# Altium PCB PCB_final.PcbDoc
Units mm, origin at the board's own origin, x right, y up, seen from the top; angles counter-clockwise.
Board outline 152.4 x 101.6 mm, 2 copper layers (Top Layer, Bottom Layer); 36 components, 46 nets, 154 pads, 7 vias.
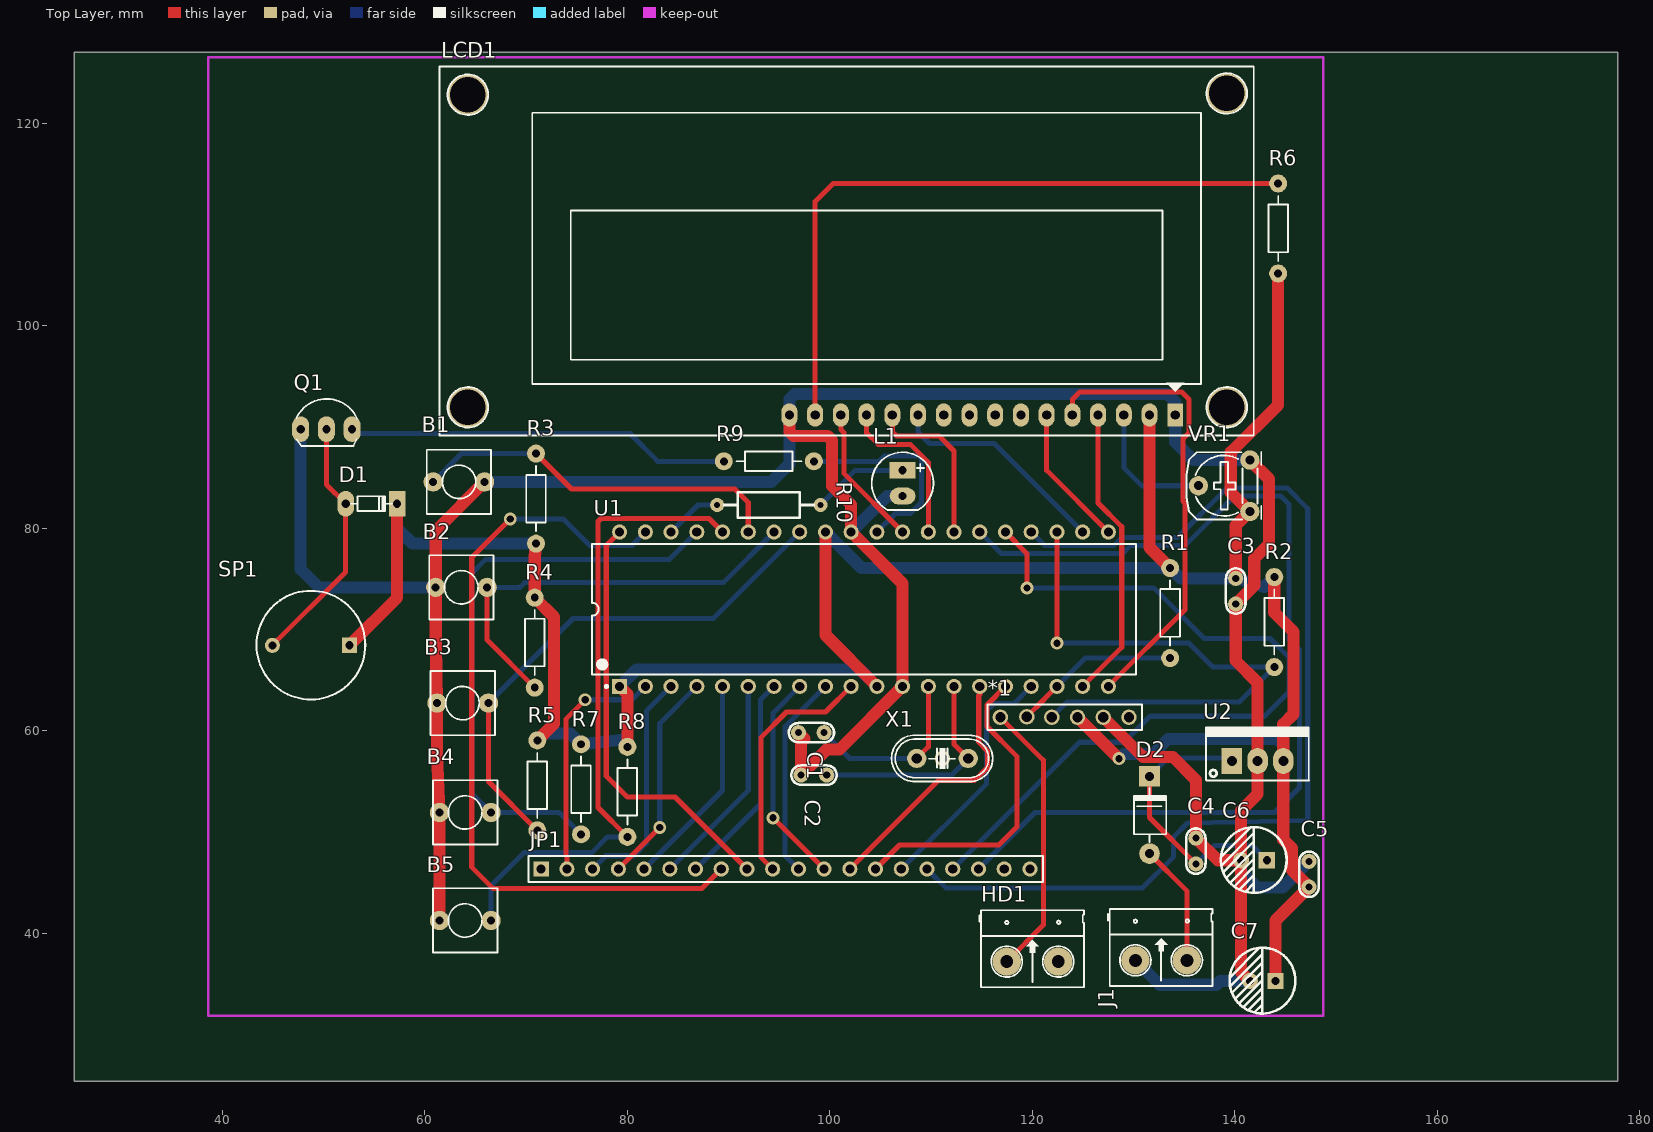
[diagram p0: Top Layer view]
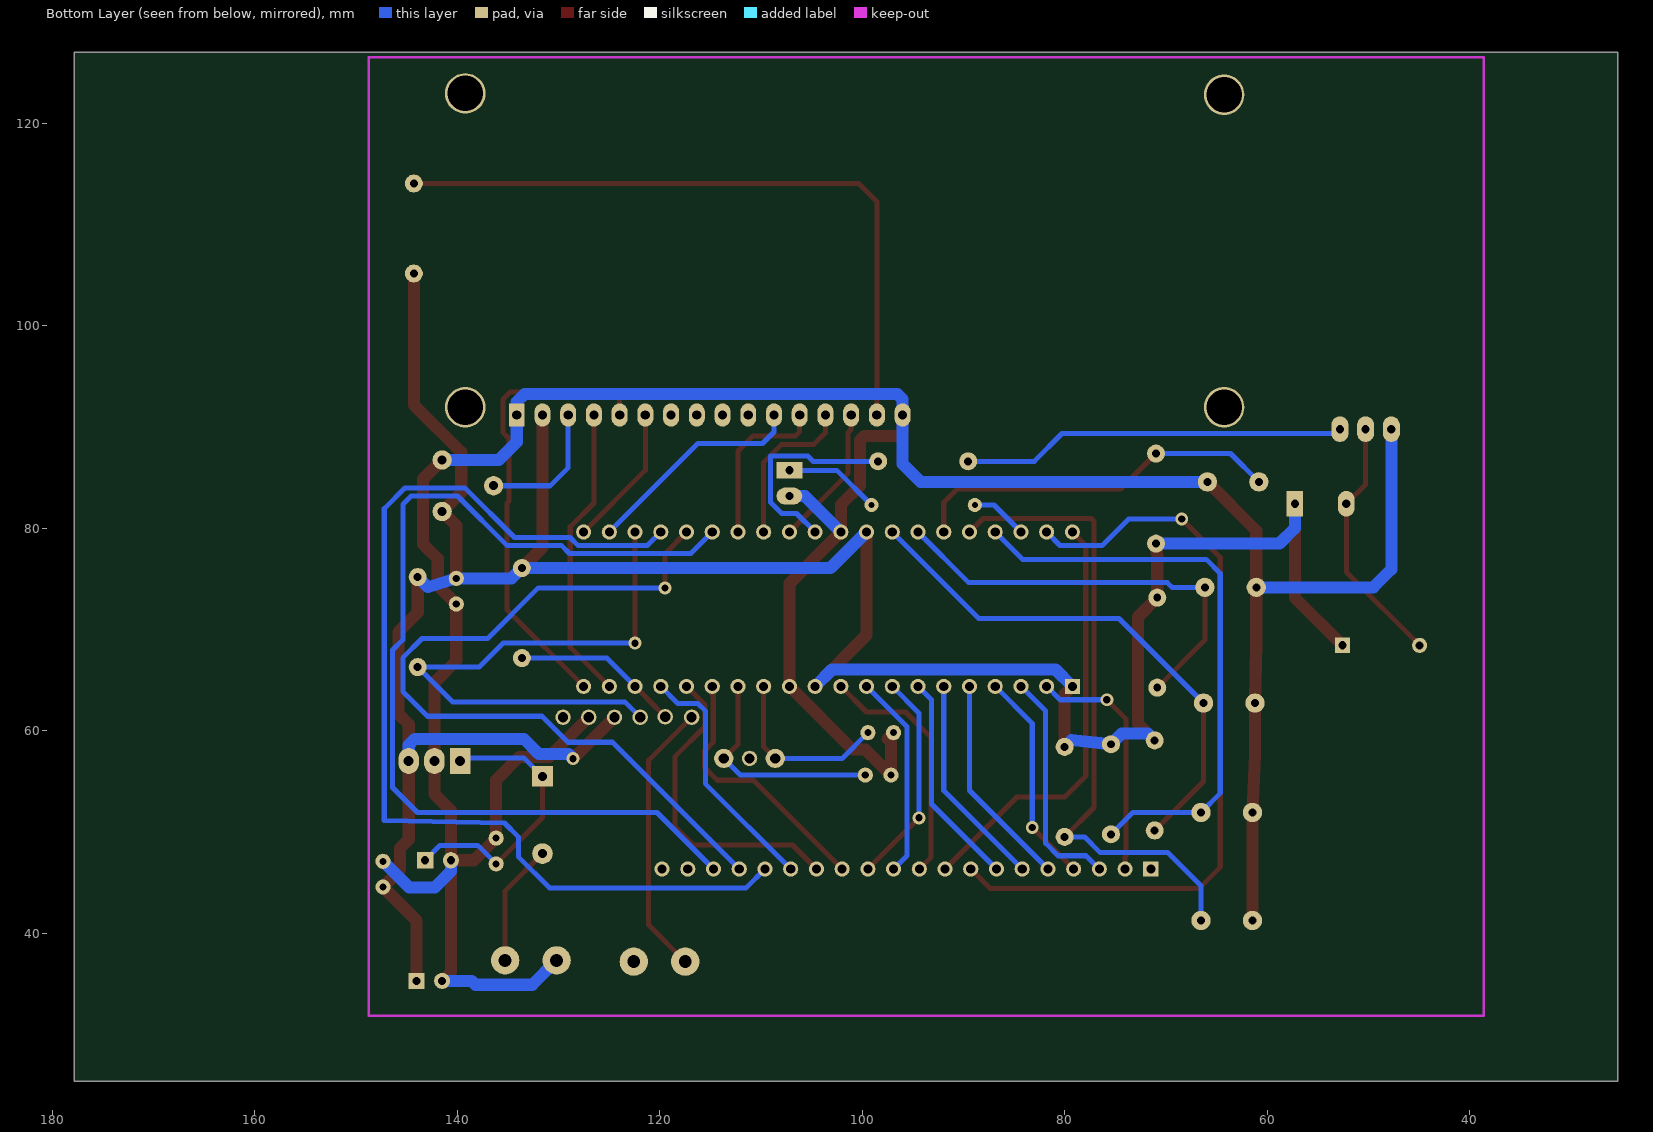
[diagram p1: Bottom Layer view, seen from below]
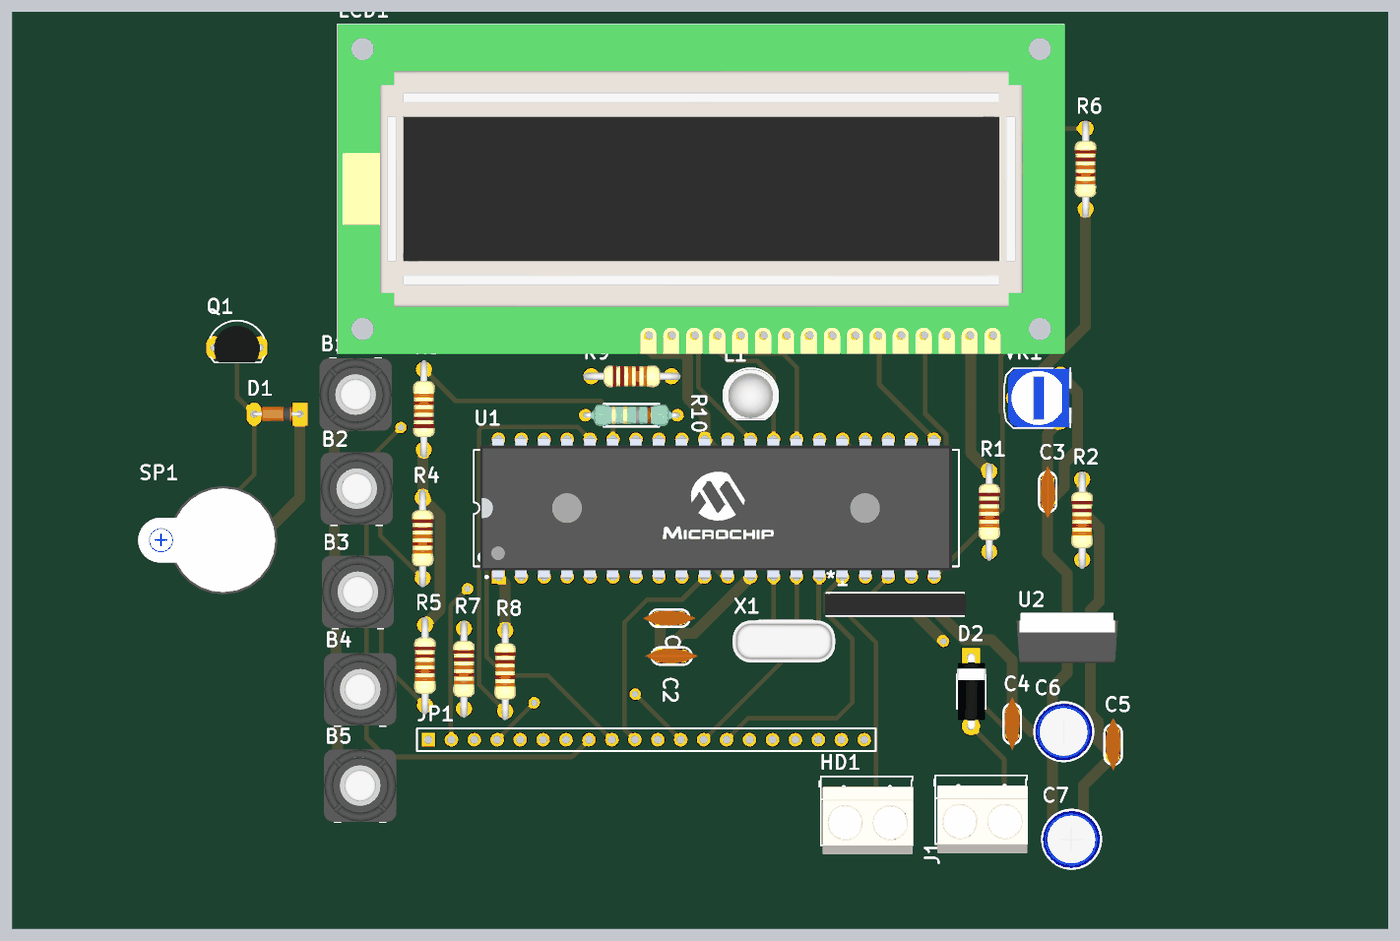
[diagram p2: 3D render of the assembled board from above, using the file's embedded part models]

## Layer stack, top to bottom
Top Solder: solder mask 0.0102, Solder Resist, Dk 3.5
Top Layer: signal copper 0.0356
Dielectric 1: dielectric 0.32, FR-4, Dk 4.8
Bottom Layer: signal copper 0.0356
Bottom Solder: solder mask 0.0102, Solder Resist, Dk 3.5

## Board outline
25.4,25.4 177.8,25.4 177.8,127 25.4,127

## Design rules (kind name [scope] priority, off if disabled: settings)
Clearance [All] p1: gap=0.31 ignorepadtopadclearanceinfootprint=FALSE
PolygonConnect [All] p1: connectstyle=Relief reliefconductorwidth=0.254 reliefentries=4 polygonreliefangle="90 Angle" airgapwidth=0.254
RoutingVias [All] p1: holewidth=0.711 width=1.27 viastyle="Through Hole" minholewidth=0.711 minwidth=1.27 maxholewidth=0.711 maxwidth=1.27
SolderMaskExpansion [All] p1: expansion=0.102 istentingtop=FALSE
SupplyNets "Schematic Supply Nets_1" [InNet('GND')] p1: voltage=0.000
SupplyNets "Schematic Supply Nets" [InNet('+5')] p2: voltage=0.000
Width 5v [InNet('+5')] p1: maxlimit=1.6 minlimit=0.5 preferedwidth=1.2
Width gnd [InNet('GND')] p2: maxlimit=1.6 minlimit=0.5 preferedwidth=1.2
Width [All] p3: maxlimit=0.8 minlimit=0.3 preferedwidth=0.5
30 further rules are at their usual default settings.

## Classes and differential pairs
component class Power_BZ_LED_HD: C4 C5 C7 D1 D2 HD1 J1 JP1 L1 P1 Q1 R9 R10 SP1 U2
component class MCU: *1 C1 C2 C3 R1 R2 U1 X1
component class LCD_BT: B1 B2 B4 LCD1 R3 R4 R5 R6 R7 R8 VR1

## Components (designator, comment, footprint, x,y, rotation, side; value= is the part's Value field where it differs from the comment)
*1 "DS3231 RTC" 2RTC-DS3231-MODULE 123.19,59.436 r90 top
B1 "" SW2 65.913,84.582 r180 top value="SW chip 2 pin"
B2 "" SW2 61.087,74.168 r0 top value="SW chip 2 pin"
B3 "" SW2 61.214,62.738 r0 top value="SW chip 2 pin"
B4 "" SW2 61.468,51.943 r0 top value="SW chip 2 pin"
B5 "" SW2 61.468,41.275 r0 top value="SW chip 2 pin"
C1 "22pF" "tu gom" 98.171,59.817 r180 top
C2 "22pF" "tu gom" 98.425,55.626 r180 top
C3 "104" "tu gom" 140.081,73.787 r270 top
C4 "100nF" "tu gom" 136.144,48.133 r90 top
C5 "100nF" "tu gom" 147.32,45.847 r90 top
C6 "100uF" "tu hoa 6.5mm" 141.859,47.244 r180 top
C7 "100uF" "tu hoa 6.5mm" 142.723,35.331 r180 top
D1 "1N4148" "DIODE 0.5A" 54.737,82.423 r180 top
D2 "1N4007" "DIODE 1A" 131.572,46.609 r270 top
HD1 "Header 2" HED2 117.475,37.211 r0 top
J1 "TERMINAL2" HED2 130.175,37.338 r0 top
JP1 "" HDR1X20 71.501,46.355 r0 top
L1 "LED RED" LED-5MM-RED 107.188,85.725 r270 top
LCD1 "LCD16x2A" LCD16X2 134.112,91.186 r180 top
Q1 "NPN S8050" QTO-92 50.292,89.789 r0 top value=C1815
R1 "1k" R1/4W 133.604,67.183 r90 top value="R1/4W - 1K"
R2 "1k" R1/4W 143.891,66.294 r90 top value="R1/4W - 1K"
R3 "1k" R1/4W 70.993,87.376 r270 top value="R1/4W - 1K"
R4 "1k" R1/4W 70.866,64.262 r90 top value="R1/4W - 1K"
R5 "1k" R1/4W 71.12,50.165 r90 top value="R1/4W - 1K"
R6 "1k" R1/4W 144.272,105.156 r90 top value="R1/4W - 1K"
R7 "1k" R1/4W 75.438,49.784 r90 top value="R1/4W - 1K"
R8 "1k" R1/4W 80.01,49.53 r90 top value="R1/4W - 1K"
R9 "1K" R1/4W 98.425,86.614 r180 top value="R1/4W - 1K"
R10 "220R" "tro vach 1/4w" 93.98,82.296 r0 top
SP1 "Speaker" SPEAKER 52.578,68.453 r180 top value="Speaker Chip"
U1 "PIC16F877A-E/P_1" PDIP600-P40 103.346,72.009 r0 top
U2 "7805" QTO-220 139.7,57.023 r0 top value=LM7805
VR1 "10K" "Bien Tro Tam Giac Dung" 141.478,81.661 r90 top
X1 "8Mhz" XT2 111.125,57.277 r0 top

## Footprints (in the part's own frame and the unit in brackets; to place one, negate y for a bottom-side part, rotate by r counter-clockwise, add the part's x,y. Pads: shape width x height; smd on the part's side, far side on the other; paste and mask are expansions set on the pad)
2RTC-DS3231-MODULE [mil]
  round 60 hole 39.37: 1(75,250) 2(76.9,147.09) 3(75,50) 4(75,-50) 5(75,-150) 6(75,-250)
  silkscreen extent 25,-300 125,300, body extent 28,-308 122,308, height 335
"Bien Tro Tam Giac Dung" [mil] "RM065"
  round 75 hole 35: 1(0,0) 2(100,200) 3(200,0)
  silkscreen extent -31,-44 231,246, body extent -28,-50 228,228, height 279
"DIODE 0.5A" [mil] "Diode muoi, xung"
  oval 65x100 hole 32: 1(100,0)
  rect 65x100 hole 32: 2(-100,0)
  silkscreen extent -80,-30 80,28, body extent -108,-33 108,32, height 61
"DIODE 1A" [mil] "Diode 1A"
  round 80 hole 35: 1(-50,0)
  rect 80x80 hole 35: 2(-350,0)
  silkscreen extent -305,-61 -95,65, body extent -366,-61 -34,65, height 122
HDR1X20 [mm] "Connector; Header; 20 Position"
  rect 1.5x1.5 hole 0.9: 1(0,0)
  round 1.5 hole 0.9: 2(2.54,0) 3(5.08,0) 4(7.62,0) 5(10.16,0) 6(12.7,0) 7(15.24,0) 8(17.78,0) 9(20.32,0) 10(22.86,0) 11(25.4,0) 12(27.94,0) 13(30.48,0) 14(33.02,0) 15(35.56,0) 16(38.1,0) 17(40.64,0) 18(43.18,0) 19(45.72,0) 20(48.26,0)
  silkscreen extent -1.27,-1.27 49.53,1.27
HED2 [mil] "Header 2, 2 pin, hight 300mil, Pin to Pin 200, Colour Green"
  round 110 hole 50: 1(0,0) 2(200,0)
  silkscreen extent -106,-100 300,200, body extent -92,-140 302,155, height 394
LCD16X2 [mil] "LCD dipslay 16x2, 16 pin"
  rect 62x90 hole 36: 1(0,0)
  oval 62x90 hole 36: 2(100,0) 3(200,0) 4(300,0) 5(400,0) 6(500,0) 7(600,0) 8(700,0) 9(800,0) 10(900,0) 11(1000,0) 12(1100,0) 13(1200,0) 14(1300,0) 15(1400,0) 16(1500,0)
  round 157.48 hole 137.8: "Hole 0"(-200,-30) "Hole 0"(-200,-1250) "Hole 0"(2750,-1245) "Hole 0"(2750,-30)
  silkscreen extent -305,-1355 2860,80, body extent -309,-1355 2860,82, height 414
LED-5MM-RED [mil] "LED 2 PIN, 5 ly , Only colour,pin to pin 100mil"
  rect 65x100 hole 32: 1(0,0)
  oval 65x100 hole 32: 2(100,0)
  silkscreen extent -70,-120 154,120, body extent -65,-119 149,118, height 339
PDIP600-P40 [mm] "DIP, 40-Leads, Row Spacing 15.24mm, Pitch 2.54mm, Body 51.8x13.5mm"
  rect 1.5x1.5 hole 0.9: 1(-24.098,-7.62)
  round 1.5 hole 0.9: 2(-21.558,-7.62) 3(-19.018,-7.62) 4(-16.478,-7.62) 5(-13.938,-7.62) 6(-11.398,-7.62) 7(-8.858,-7.62) 8(-6.318,-7.62) 9(-3.778,-7.62) 10(-1.238,-7.62) 11(1.302,-7.62) 12(3.842,-7.62) 13(6.382,-7.62) 14(8.922,-7.62) 15(11.462,-7.62) 16(14.002,-7.62) 17(16.542,-7.62) 18(19.082,-7.62) 19(21.622,-7.62) 20(24.162,-7.62) 21(24.162,7.62) 22(21.622,7.62) 23(19.082,7.62) 24(16.542,7.62) 25(14.002,7.62) 26(11.462,7.62) 27(8.922,7.62) 28(6.382,7.62) 29(3.842,7.62) 30(1.302,7.62) 31(-1.238,7.62) 32(-3.778,7.62) 33(-6.318,7.62) 34(-8.858,7.62) 35(-11.398,7.62) 36(-13.938,7.62) 37(-16.478,7.62) 38(-19.018,7.62) 39(-21.558,7.62) 40(-24.098,7.62)
  silkscreen extent -26.82,-7.74 26.88,6.45, body extent -26.13,-7.76 26.13,7.77, height 3.87
QTO-92 [mil] "TO-92"
  oval 66x100 hole 32: 1(-100,0) 2(0,0) 3(100,0)
  silkscreen extent -117,-65 120,118, body extent -109,-66 109,95, height 245
QTO-220 [mil] "TO-220 - 1-2-3"
  rect 80x100 hole 39: 1(0,0)
  oval 80x100 hole 39: 2(100,0) 3(200,0)
  silkscreen extent -100,-76 300,130, body extent -121,-85 321,100, height 755
R1/4W [mil] "R 1/4W, 2 Pin, 350mil"
  round 70 hole 31: 1(0,0) 2(350,0)
  silkscreen extent 48,-38 302,38, body extent -40,-47 386,47, height 111
SPEAKER [mm]
  rect 1.5x1.5 hole 0.8: 1(0,0)
  round 1.5 hole 0.8: 2(7.62,0.013)
  silkscreen extent -1.55,-5.38 9.18,5.36, body extent -2.22,-6 13.24,6, height 4.5
SW2 [mil] "SW button 2pin, 250x 250 mil"
  round 75 hole 31: 1(0,0) 2(200,0)
  silkscreen extent -25,-125 225,125, body extent -60,-163 255,157, height 257
"tro vach 1/4w" [mm]
  round 1.4 hole 0.6: 1(-5.1,0) 2(5.1,0)
  silkscreen extent -4.39,-1.25 4.42,1.25, body extent -5.38,-1.2 5.38,1.2, height 2.41
"tu gom" [mm] "Tu gom mini"
  round 1.5 hole 0.7: 1(-1.27,0) 2(1.27,0)
  silkscreen extent -2.25,-0.97 2.22,0.97, body extent -2.92,-0.85 2.92,0.85, height 6.12
"tu hoa 6.5mm" [mm]
  rect 1.6x1.6 hole 0.8: 1(-1.295,0.025)
  round 1.6 hole 0.8: 2(1.245,0.025)
  silkscreen extent -3.25,-3.25 3.25,3.25, body extent -3.15,-3.15 3.2,3.2, height 14.55
XT2 [mm] "Footpin for Crystal 2 pin"
  round 1.524 hole 1: 0(0,0)
  round 1.905 hole 1: 1(-2.54,0) 2(2.54,0)
  silkscreen extent -5.03,-2.29 4.96,2.29, body extent -5.93,-2.36 5.42,2.29, height 3.5

## Part data
B1 B2 B3 B4 B5: library part SW2, "Switch button 2 pin"
C1 C2 C4 C5: library part "Tu gom 22pF 50V", "Cắm", Chung_Loai=Cắm, Don_Vi=Con, Ma_Hang=MH004771, So_Chan=2, Ten_Linh_Kien="Tụ gốm 22P 50V"
C3: library part "Tu gom 104 50V", "Cắm", Chung_Loai=Cắm, Don_Vi=Con, Ma_Hang=MH004761, So_Chan=2, Ten_Linh_Kien="Tụ gốm 104 100nF 50V"
C6 C7: library part "Tu Hoa 100uF 35V 6x8", "Cắm", Chung_Loai=Cắm, Don_Vi=Con, Ma_Hang=MH006862, So_Chan=2, Ten_Linh_Kien="Tụ Hóa 100uF 35V"
D1: library part "Diode 1N4148", "Cắm", Chung_Loai=Cắm, Don_Vi=Con, Ma_Hang=MH001065, Ten_Linh_Kien="Diode 1N4148 DO35 450mA 100V ( 1N4148 DIP)"
D2: library part "Diode 1N4007", "Cắm", Chung_Loai=Cắm, Don_Vi=Con, Ma_Hang=MH001063, Ten_Linh_Kien="Diode 1N4007 1A (DIP)"
HD1: library part Hed2, "Header 2 (Green)"
J1: library part "Header 2P 2.54 Duc Cong", "Cắm", Chung_Loai=Cắm, Don_Vi=Con, Ma_Hang=MH002852, Ten_Linh_Kien="Header 2P XH2.54-2P Đực Cong"
JP1: library part "Header 20", "Header, 20-Pin, Right Angle"
L1: library part "LED 5mm Do", "Cắm", Chung_Loai=Cắm, Don_Vi=Con, Ma_Hang=MH008967, Ten_Linh_Kien="Led 5MM Phủ Đỏ (1000c)"
LCD1: library part LCD16x2, "LCD dipslay 16 char, 2 line"
Q1: library part NPN_ECB, "P 600mW, ECB"
R1 R2 R3 R4 R5 R6 R7 R8 R9: library part R1/4W, "Resistor 1/4W"
R10: library part "Tro Vach 1/4W 5% 220R", "Cắm", Chung_Loai=Cắm, Don_Vi=Con, Ma_Hang=MH007300, So_Chan=2, Ten_Linh_Kien="Trở Vạch 1/4w 5% 220R"
SP1: library part SPK, "Speaker Chip"
U1: "Enhanced FLASH Microcontroller, 8K (x14-Bit words) FLASH, 368 Bytes RAM, 40-Pin PDIP, Standard VDD Range, Extended Temperature", Supplier Part Number 1=PIC16F877A-E/P-ND, ComponentAvailability="Unknown. Contact manufacturer to determine status.", ComponentLink1Description=Datasheet, ComponentLink1URL=http://ww1.microchip.com/downloads/en/DeviceDoc/39582b.pdf, ComponentLink2Description="Packaging Specification", ComponentLink2URL=http://www.microchip.com/stellent/groups/techpub_sg/documents/packagingspec/en012702.pdf, ComponentLink3Description="Microchip.com Home", ComponentLink3URL=http://www.microchip.com/, DatasheetVersion="revB, Oct-2003", LatestRevisionDate=29-Jan-2009, LatestRevisionNote="Sch. layout revised. 3D Model Removed.", PackageDescription="40-Lead Plastic Dual In-Line (P) - 600 mil Body [PDIP]", PackageReference=PDIP600-P40, PackageVersion="revBB, Aug-2009", Published=11-Oct-2004, Publisher="Altium Limited", Supplier 1=Digi-Key, Supplier 2=Farnell, Supplier Part Number 2=1567990
U2: library part LM78xx, "On ap +, from + 5 to + 24VDC"
VR1: library part "Bien tro tam giac 10K Dung", "Cắm", Chung_Loai=Cắm, Don_Vi=Con, Ma_Hang=MH000919, Ten_Linh_Kien="Biến Trở Tam Giác 103-10K RM065 (Chân Đứng)"
X1: library part XT2, "Crystal For all Crystal 2pin."

## Via types
v1: diameter 1.27, hole 0.711, Top Layer to Bottom Layer, 7 vias

## Nets (pads, with @x,y where several pads share a name; then routed paths per layer and width w, separated by ;. In a path a pad name is that pad's centre, name@x,y a point inside that pad or via, vN(x,y) a via of type N, cw(c..) or ccw(c..) an arc to the next point about the centre after c; other vN are vias at no path point)
32kHz: HD1.2
+5: *1.4 C3.1 C5.1 C7.1 D1.2 LCD1.2 R1.2 R2.2 R3.2 R4.2 R5.2 R6.1 R7.2 R8.2 SP1.1 U1.1 U1.11 U1.32 U2.3 VR1.1 | length 278.2
  Top Layer w1.2: SP1.1 57.277,73.152 D1.2 ; R3.2 70.866,77.165 R4.2 72.771,71.247 72.771,60.706 R5.2 ; U1.1 80.01,63.627 R8.2 ; U1.32 99.568,69.469 U1.11 ; *1.4 v1(128.549,57.252) ; LCD1.2 131.572,78.105 R1.2 ; C3.1 140.081,80.264 VR1.1 139.598,83.541 139.598,87.503 144.272,92.177 R6.1 ; R2.2 143.891,71.679 145.796,69.774 145.796,61.671 144.78,60.655 U2.3 144.78,49.276 145.644,48.412 145.644,46.253 C5.1 144.018,41.275 C7.1
  Bottom Layer w1.2: D1.2 57.277,80.01 58.801,78.486 R3.2 ; R5.2 71.806,59.741 74.371,59.741 R7.2 79.35,59.08 R8.2 ; U1.1 80.924,66.065 102.972,66.065 U1.11 ; U1.32 103.124,76.073 R1.2 134.62,75.057 C3.1 142.9,74.193 R2.2 ; v1(128.549,57.252) 129.007,57.709 131.928,57.709 133.426,59.207 144.17,59.207 144.78,58.598 U2.3
BT1: B3.2 R5.1 U1.33 | length 52.3
  Top Layer w0.5: B3.2 66.294,54.991 R5.1
  Bottom Layer w0.5: B3.2 74.651,71.095 88.494,71.095 U1.33
BT2: B2.2 R4.1 U1.34 | length 42.4
  Top Layer w0.5: B2.2 66.167,68.961 R4.1
  Bottom Layer w0.5: B2.2 69.418,74.168 69.875,74.625 89.484,74.625 U1.34
BT3: B1.2 R3.1 U1.35 | length 37.2
  Top Layer w0.5: R3.1 74.498,83.871 90.627,83.871 91.948,82.55 U1.35
  Bottom Layer w0.5: B1.2 63.627,87.376 R3.1
BT4: B5.2 R8.1 U1.36 | length 64.2
  Top Layer w0.5: R8.1 77.114,52.426 77.114,80.67 77.419,80.975 88.062,80.975 U1.36
  Bottom Layer w0.5: B5.2 66.548,44.704 69.85,48.006 76.532,48.006 78.056,49.53 R8.1
BT5: B4.2 R7.1 U1.37 | length 58.1
  Bottom Layer w0.5: R7.1 73.279,51.943 B4.2 64.643,53.848 64.643,75.54 66.04,76.937 84.176,76.937 U1.37
BZ: R9.1 U1.30 | length 21
  Bottom Layer w0.5: R9.1 104.851,86.614 105.359,87.122 109.042,87.122 109.042,82.55 107.95,81.458 106.477,81.458 U1.30
D4: LCD1.11 U1.22 | length 22
  Bottom Layer w0.5: LCD1.11 108.712,89.51 109.855,88.367 116.23,88.367 U1.22
D5: LCD1.12 U1.27 | length 16.5
  Top Layer w0.5: LCD1.12 106.172,89.535 106.604,89.103 110.795,89.103 112.268,87.63 U1.27
D6: LCD1.13 U1.28 | length 15.9
  Top Layer w0.5: LCD1.13 103.632,89.433 104.775,88.29 107.95,88.29 109.728,86.512 U1.28
D7: LCD1.14 U1.29 | length 14.1
  Top Layer w0.5: LCD1.14 101.092,89.751 101.384,89.459 101.384,85.433 U1.29
EN: LCD1.6 U1.21 | length 14.1
  Top Layer w0.5: LCD1.6 121.412,85.725 U1.21
GND: *1.5 B1.1 B2.1 B3.1 B4.1 B5.1 C1.2 C2.2 C3.2 C4.2 C5.2 C6.2 C7.2 J1.1 L1.2 LCD1.1 LCD1.16 Q1.1 U1.12 U1.31 U2.2 VR1.3 | length 319.6
  Top Layer w1.2: B5.1 B4.1 61.214,57.607 B3.1 61.087,68.58 B2.1 61.087,79.756 B1.1 ; LCD1.16 96.012,89.535 96.418,89.129 99.767,89.129 100.224,88.671 100.224,84.201 102.108,82.317 U1.31 107.188,74.549 U1.12 100.94,58.141 99.67,58.141 C2.2 97.155,58.852 97.511,59.207 C1.2 ; *1.5 130.912,57.429 133.858,57.429 136.144,55.143 C4.2 138.328,47.219 C6.2 ; C7.2 140.614,36.17 C6.2 ; VR1.3 143.358,84.861 143.358,78.435 141.91,76.987 141.91,74.346 C3.2 140.081,66.929 142.24,64.77 U2.2 142.24,53.746 140.614,52.121 C6.2
  Bottom Layer w1.2: Q1.1 47.752,75.946 49.53,74.168 B2.1 ; B1.1 94.234,84.582 96.012,86.36 LCD1.16 96.012,92.735 96.52,93.243 133.35,93.243 134.112,92.481 LCD1.1 134.112,88.519 135.89,86.741 VR1.3 ; U1.31 105.664,83.185 L1.2 ; J1.1 132.588,34.925 138.176,34.925 138.557,35.306 C7.2 ; C6.2 140.614,46.126 142.215,44.526 144.729,44.526 C5.2
INT/SQW: *1.1 HD1.1 | length 27.4
  Top Layer w0.5: *1.1 121.082,57.099 121.082,40.818 HD1.1
"LED ALARM": R10.1 U1.38 | length 5.7
  Bottom Layer w0.5: U1.38 86.995,82.296 R10.1
NetC1_1: C1.1 U1.13 X1.1 | length 17.8
  Top Layer w0.5: X1.1 109.728,58.42 U1.13
  Bottom Layer w0.5: C1.1 101.981,57.277 X1.1
NetC2_1: C2.1 U1.14 X1.2 | length 22.3
  Top Layer w0.5: U1.14 112.268,58.674 X1.2
  Bottom Layer w0.5: C2.1 112.014,55.626 X1.2
NetC4_1: C4.1 C6.1 D2.2 U2.1 | length 28.1
  Top Layer w0.5: D2.2 131.572,51.435 C4.1
  Bottom Layer w0.5: D2.2 133.376,57.303 139.7,57.303 U2.1 ; C4.1 137.973,48.692 141.681,48.692 C6.1
NetD1_1: D1.1 Q1.2 SP1.2 | length 25.1
  Top Layer w0.5: SP1.2 52.197,75.679 D1.1 50.292,84.328 Q1.2
NetD2_1: D2.1 J1.2 | length 12.1
  Top Layer w0.5: D2.1 135.255,44.196 J1.2
NetL1_1: L1.1 R10.2 | length 9.5
  Bottom Layer w0.5: R10.2 102.509,85.725 L1.1
NetLCD1_3: LCD1.3 VR1.2 | length 13.3
  Bottom Layer w0.5: LCD1.3 129.032,85.979 130.81,84.201 VR1.2
NetLCD1_15: LCD1.15 R6.2 | length 67.5
  Top Layer w0.5: LCD1.15 98.552,112.268 100.33,114.046 R6.2
NetQ1_3: Q1.3 R9.2 | length 38.3
  Bottom Layer w0.5: Q1.3 52.832,89.357 80.264,89.357 83.007,86.614 R9.2
RA0: JP1.2 U1.2 | length 24
  Top Layer w0.5: JP1.2 74.041,47.549 73.965,47.625 73.965,61.189 v1(75.844,63.068)
  Bottom Layer w0.5: v1(75.844,63.068) 80.467,63.068 U1.2
RA1: JP1.3 U1.3 | length 22.9
  Bottom Layer w0.5: JP1.3 77.891,47.665 80.66,47.665 81.89,48.895 81.89,61.951 U1.3
RA2: JP1.4 U1.4 | length 21.2
  Top Layer w0.5: JP1.4 v1(83.21,50.444)
  Bottom Layer w0.5: v1(83.21,50.444) 83.21,60.731 U1.4
RA3: JP1.5 U1.5 | length 21.2
  Bottom Layer w0.5: JP1.5 89.408,54.102 U1.5
RA4: JP1.6 U1.6 | length 21.2
  Bottom Layer w0.5: JP1.6 91.948,54.102 U1.6
RA5: JP1.7 U1.7 | length 21.2
  Bottom Layer w0.5: JP1.7 93.167,52.781 93.167,63.068 U1.7
RB6: JP1.8 U1.39 | length 77.2
  Top Layer w0.5: v1(68.453,80.924) 64.643,77.114 64.643,46.533 66.726,44.45 87.376,44.45 JP1.8
  Bottom Layer w0.5: v1(68.453,80.924) 73.685,80.924 76.302,78.308 80.467,78.308 U1.39
RB7: JP1.9 U1.40 | length 42.3
  Top Layer w0.5: U1.40 77.927,78.308 77.927,55.55 80.01,53.467 84.709,53.467 JP1.9
RC0: JP1.13 U1.15 | length 26.1
  Top Layer w0.5: JP1.13 110.744,55.118 114.3,55.118 115.57,56.388 115.57,58.014 114.708,58.876 114.708,63.473 114.808,63.573 U1.15
RC1: JP1.14 U1.16 | length 31.5
  Top Layer w0.5: JP1.14 106.883,48.717 116.688,48.717 118.466,50.495 118.466,57.48 115.518,60.428 115.518,62.559 U1.16
RC2: JP1.15 U1.17 | length 24.5
  Bottom Layer w0.5: JP1.15 115.494,54.788 115.494,61.976 116.205,62.687 118.186,62.687 U1.17
RC5: JP1.16 U1.24 | length 104
  Bottom Layer w0.5: JP1.16 111.455,44.501 130.886,44.501 133.96,47.574 133.96,49.53 135.331,50.902 147.193,51.13 147.193,81.94 145.136,83.998 139.243,83.998 134.341,79.096 128.854,79.096 128.078,78.319 121.198,78.319 U1.24
RC6: JP1.17 U1.25 | length 78.9
  Top Layer w0.5: U1.25 119.482,77.495 v1(119.482,74.117)
  Bottom Layer w0.5: JP1.17 124.657,58.871 129.052,58.871 131.623,61.443 142.926,61.443 145.364,63.881 145.364,67.208 143.459,69.113 136.982,69.113 131.978,74.117 v1(119.482,74.117)
RC7: JP1.18 U1.26 | length 97.5
  Bottom Layer w0.5: JP1.18 120.269,51.943 143.916,51.943 146.38,54.407 146.38,67.97 145.364,68.986 145.364,82.347 144.526,83.185 139.954,83.185 135.052,78.283 129.673,78.283 128.899,77.509 116.928,77.509 U1.26
RE0: JP1.12 U1.8 | length 21.2
  Top Layer w0.5: v1(94.386,51.41) JP1.12
  Bottom Layer w0.5: v1(94.386,51.41) 94.386,61.747 U1.8
RE1: JP1.11 U1.9 | length 20.2
  Bottom Layer w0.5: JP1.11 95.581,47.675 95.581,60.402 U1.9
RE2: JP1.10 U1.10 | length 24.5
  Top Layer w0.5: JP1.10 93.19,47.526 93.19,59.317 95.722,61.849 99.568,61.849 U1.10
RS: LCD1.4 U1.19 | length 29.4
  Top Layer w0.5: U1.19 128.829,68.25 128.829,80.162 126.492,82.499 LCD1.4
RW: LCD1.5 U1.20 | length 45.5
  Top Layer w0.5: LCD1.5 123.952,92.71 124.714,93.472 134.722,93.472 135.484,92.71 135.484,89.484 134.874,88.875 134.874,82.677 135.077,82.474 135.077,71.958 U1.20
SCL: *1.2 R1.1 U1.18 | length 16.6
  Top Layer w0.5: *1.2 121.209,63.144 121.209,63.17 U1.18
  Bottom Layer w0.5: U1.18 125.222,67.183 R1.1
SDA: *1.3 R2.1 U1.23 | length 57.4
  Top Layer w0.5: v1(122.428,68.656) U1.23
  Bottom Layer w0.5: *1.3 123.444,62.865 140.462,62.865 R2.1 137.82,66.294 135.458,68.656 v1(122.428,68.656)
pads on no net: "LCD1.Hole 0" *1.6 JP1.1 JP1.19 JP1.20 LCD1.7 LCD1.8 LCD1.9 LCD1.10 X1.0

## Keep-outs
Keep-Out Layer:
  lines w0.254: 38.608,31.877 38.608,126.492 148.717,126.492 148.717,31.877 38.608,31.877